# EAGLE board fdc6326l_breakout_panel (EAGLE 6.5.0)
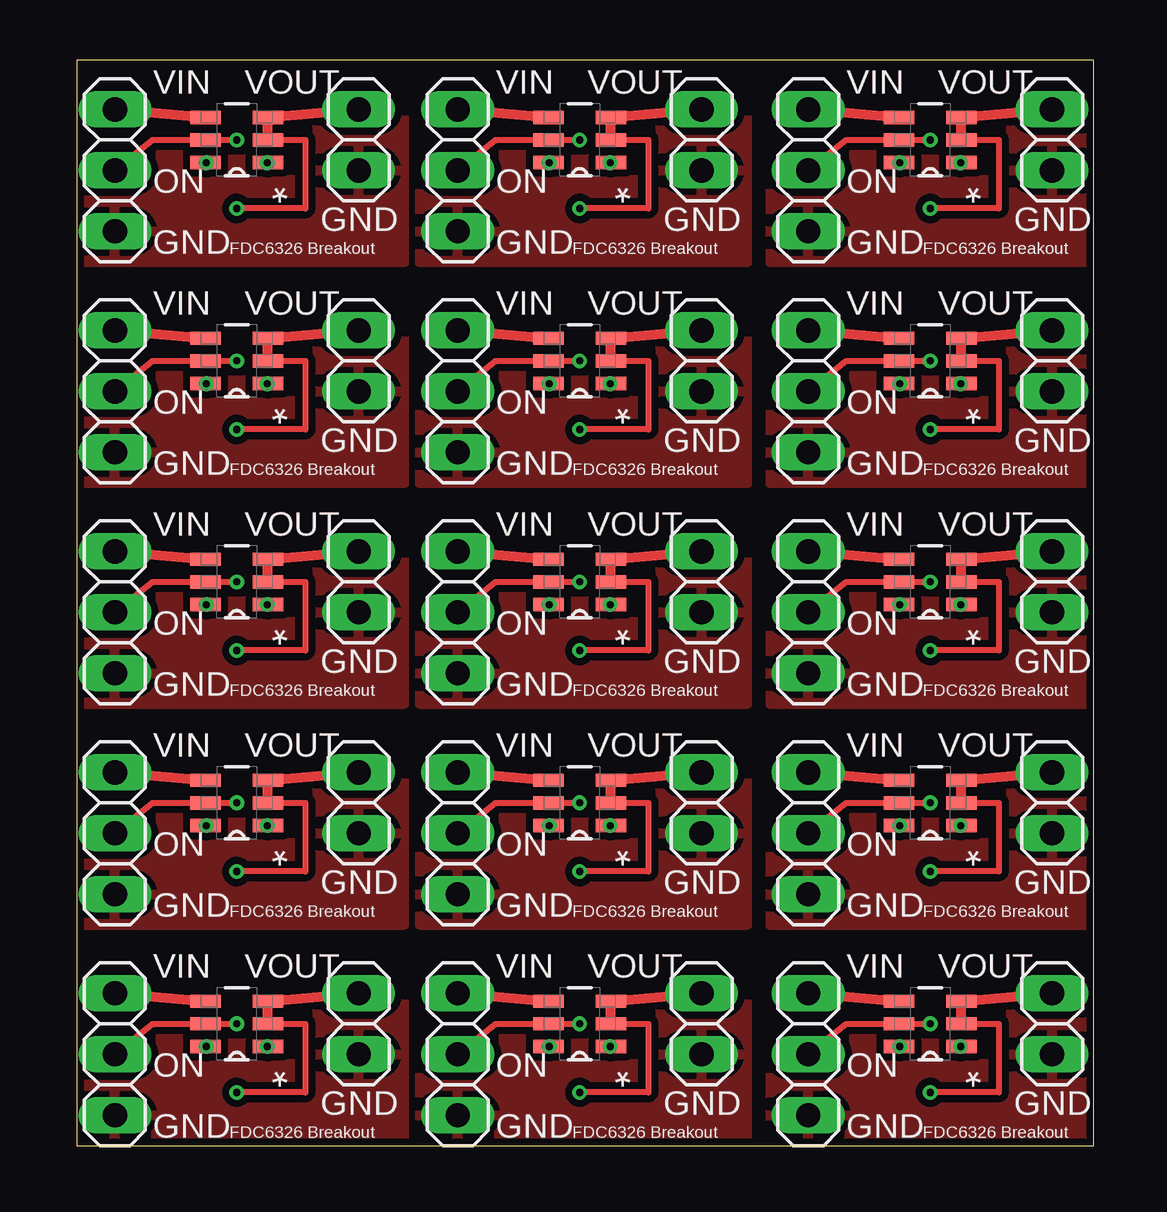
[diagram p0: board, top side]
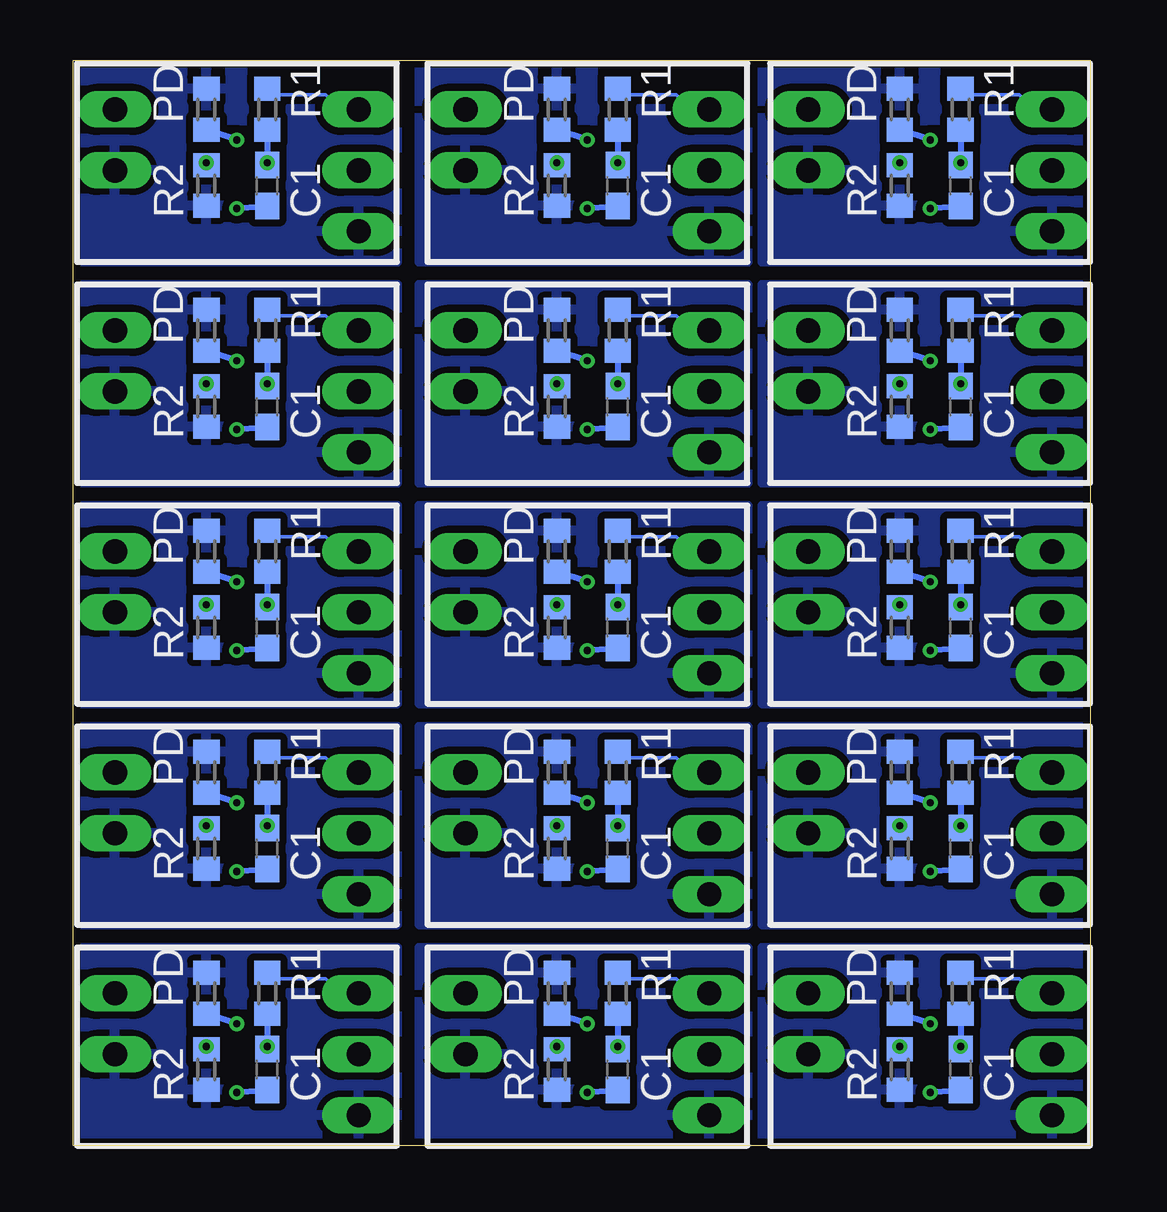
[diagram p1: board, bottom side, seen from below]

Size 42.38 x 45.24 mm. Coordinates in mm from the lower left corner, seen from the top.
Outline: 0,0 42.38,0 42.38,45.24 0,45.24 0,0
Copper layers (1*2*15*16): Top 0.035mm / dielectric 0.2mm / Route2 0.0175mm / dielectric 1.1mm / Route15 0.0175mm / dielectric 0.2mm / Bottom 0.035mm
Design rules "SeeedStudio_DRU_no_angle_20130527": minimum track width 6mil, minimum drill 12mil, track to track 6mil, track to pad 6mil, pad to pad 6mil, via to via 6mil, smd to smd 0mil, copper to edge 10mil, drill to drill 10mil, minimum pad ring 6mil, minimum via ring 6mil, stop-mask expansion 2mil, vias tented up to drill 25mil, thermal gap 10mil

## Footprints (pad centres in the part's own frame; a part is rotated, then mirrored left to right if it is on the bottom)
C0603 = smd 1.1 x 1: 1 -0.85,0; 2 0.85,0
1X03 = drill 1.016 long: 1 -2.54,0; 2 0,0; 3 2.54,0
1X02 = drill 1.016 long: 1 -1.27,0; 2 1.27,0
R0603 = smd 1 x 1.1: 1 -0.85,0; 2 0.85,0
SOT95P280X110-6N = smd 1.27 x 0.559: 1 -1.295,0.94; 2 -1.295,0; 3 -1.295,-0.94; 4 1.295,-0.94; 5 1.295,0; 6 1.295,0.94

## Placement (x,y rotation side)
C1  10pF  [C0603]  5.4,3.17 90 bottom
C2  10pF  [C0603]  5.4,12.38 90 bottom
C3  10pF  [C0603]  19.68,3.17 90 bottom
C4  10pF  [C0603]  19.68,12.38 90 bottom
C5  10pF  [C0603]  34.29,3.17 90 bottom
C6  10pF  [C0603]  34.29,12.38 90 bottom
C7  10pF  [C0603]  5.4,21.59 90 bottom
C8  10pF  [C0603]  19.68,21.59 90 bottom
C9  10pF  [C0603]  34.29,21.59 90 bottom
C10  10pF  [C0603]  5.4,30.8 90 bottom
C11  10pF  [C0603]  19.68,30.8 90 bottom
C12  10pF  [C0603]  34.29,30.8 90 bottom
C13  10pF  [C0603]  5.4,40.01 90 bottom
C14  10pF  [C0603]  19.68,40.01 90 bottom
C15  10pF  [C0603]  34.29,40.01 90 bottom
JP1  [1X03]  1.59,3.81 270 top
JP2  [1X02]  11.75,5.08 270 top
JP3  [1X03]  1.59,13.02 270 top
JP4  [1X02]  11.75,14.29 270 top
JP5  [1X03]  15.88,3.81 270 top
JP6  [1X02]  26.04,5.08 270 top
JP7  [1X03]  15.88,13.02 270 top
JP8  [1X02]  26.04,14.29 270 top
JP9  [1X03]  30.48,3.81 270 top
JP10  [1X02]  40.64,5.08 270 top
JP11  [1X03]  30.48,13.02 270 top
JP12  [1X02]  40.64,14.29 270 top
JP13  [1X03]  1.59,22.23 270 top
JP14  [1X02]  11.75,23.5 270 top
JP15  [1X03]  15.88,22.23 270 top
JP16  [1X02]  26.04,23.5 270 top
JP17  [1X03]  30.48,22.23 270 top
JP18  [1X02]  40.64,23.5 270 top
JP19  [1X03]  1.59,31.43 270 top
JP20  [1X02]  11.75,32.7 270 top
JP21  [1X03]  15.88,31.43 270 top
JP22  [1X02]  26.04,32.7 270 top
JP23  [1X03]  30.48,31.43 270 top
JP24  [1X02]  40.64,32.7 270 top
JP25  [1X03]  1.59,40.64 270 top
JP26  [1X02]  11.75,41.91 270 top
JP27  [1X03]  15.88,40.64 270 top
JP28  [1X02]  26.04,41.91 270 top
JP29  [1X03]  30.48,40.64 270 top
JP30  [1X02]  40.64,41.91 270 top
PD  10k  [R0603]  7.94,6.35 90 bottom
PD1  10k  [R0603]  7.94,15.56 90 bottom
PD2  10k  [R0603]  22.23,6.35 90 bottom
PD3  10k  [R0603]  22.23,15.56 90 bottom
PD4  10k  [R0603]  36.83,6.35 90 bottom
PD5  10k  [R0603]  36.83,15.56 90 bottom
PD6  10k  [R0603]  7.94,24.77 90 bottom
PD7  10k  [R0603]  22.23,24.77 90 bottom
PD8  10k  [R0603]  36.83,24.77 90 bottom
PD9  10k  [R0603]  7.94,33.97 90 bottom
PD10  10k  [R0603]  22.23,33.97 90 bottom
PD11  10k  [R0603]  36.83,33.97 90 bottom
PD12  10k  [R0603]  7.94,43.18 90 bottom
PD13  10k  [R0603]  22.23,43.18 90 bottom
PD14  10k  [R0603]  36.83,43.18 90 bottom
R1  100k  [R0603]  5.4,6.35 270 bottom
R2  1k  [R0603]  7.94,3.17 270 bottom
R3  100k  [R0603]  5.4,15.56 270 bottom
R4  1k  [R0603]  7.94,12.38 270 bottom
R5  100k  [R0603]  19.68,6.35 270 bottom
R6  1k  [R0603]  22.23,3.17 270 bottom
R7  100k  [R0603]  19.68,15.56 270 bottom
R8  1k  [R0603]  22.23,12.38 270 bottom
R9  100k  [R0603]  34.29,6.35 270 bottom
R10  1k  [R0603]  36.83,3.17 270 bottom
R11  100k  [R0603]  34.29,15.56 270 bottom
R12  1k  [R0603]  36.83,12.38 270 bottom
R13  100k  [R0603]  5.4,24.77 270 bottom
R14  1k  [R0603]  7.94,21.59 270 bottom
R15  100k  [R0603]  19.68,24.77 270 bottom
R16  1k  [R0603]  22.23,21.59 270 bottom
R17  100k  [R0603]  34.29,24.77 270 bottom
R18  1k  [R0603]  36.83,21.59 270 bottom
R19  100k  [R0603]  5.4,33.97 270 bottom
R20  1k  [R0603]  7.94,30.8 270 bottom
R21  100k  [R0603]  19.68,33.97 270 bottom
R22  1k  [R0603]  22.23,30.8 270 bottom
R23  100k  [R0603]  34.29,33.97 270 bottom
R24  1k  [R0603]  36.83,30.8 270 bottom
R25  100k  [R0603]  5.4,43.18 270 bottom
R26  1k  [R0603]  7.94,40.01 270 bottom
R27  100k  [R0603]  19.68,43.18 270 bottom
R28  1k  [R0603]  22.23,40.01 270 bottom
R29  100k  [R0603]  34.29,43.18 270 bottom
R30  1k  [R0603]  36.83,40.01 270 bottom
U1  FDC6326L  [SOT95P280X110-6N]  6.67,5.08 180 top
U2  FDC6326L  [SOT95P280X110-6N]  6.67,14.29 180 top
U3  FDC6326L  [SOT95P280X110-6N]  20.95,5.08 180 top
U4  FDC6326L  [SOT95P280X110-6N]  20.95,14.29 180 top
U5  FDC6326L  [SOT95P280X110-6N]  35.56,5.08 180 top
U6  FDC6326L  [SOT95P280X110-6N]  35.56,14.29 180 top
U7  FDC6326L  [SOT95P280X110-6N]  6.67,23.5 180 top
U8  FDC6326L  [SOT95P280X110-6N]  20.95,23.5 180 top
U9  FDC6326L  [SOT95P280X110-6N]  35.56,23.5 180 top
U10  FDC6326L  [SOT95P280X110-6N]  6.67,32.7 180 top
U11  FDC6326L  [SOT95P280X110-6N]  20.95,32.7 180 top
U12  FDC6326L  [SOT95P280X110-6N]  35.56,32.7 180 top
U13  FDC6326L  [SOT95P280X110-6N]  6.67,41.91 180 top
U14  FDC6326L  [SOT95P280X110-6N]  20.95,41.91 180 top
U15  FDC6326L  [SOT95P280X110-6N]  35.56,41.91 180 top

## Library data of the parts
C1-C15 PD PD1-PD14 R1-R30 = rcl
JP1-JP30 = pinhead
U1-U15 = Fairchild_By_element14_Batch_1; MPN: FDC6326L; OC_FARNELL: 1706325; OC_NEWARK: 58K1423; PACKAGE: SSOT-23-6; SUPPLIER: FAIRCHILD SEMICONDUCTOR

## Nets
C1_R1: C1.2 R1.2 U1.6
C1_R2: C2.2 R3.2 U2.6
C1_R3: C3.2 R5.2 U3.6
C1_R4: C4.2 R7.2 U4.6
C1_R5: C5.2 R9.2 U5.6
C1_R6: C6.2 R11.2 U6.6
C1_R7: C7.2 R13.2 U7.6
C1_R8: C8.2 R15.2 U8.6
C1_R9: C9.2 R17.2 U9.6
C1_R10: C10.2 R19.2 U10.6
C1_R11: C11.2 R21.2 U11.6
C1_R12: C12.2 R23.2 U12.6
C1_R13: C13.2 R25.2 U13.6
C1_R14: C14.2 R27.2 U14.6
C1_R15: C15.2 R29.2 U15.6
GND: JP1.3 JP2.2 PD.2 R2.2
GND1: JP3.3 JP4.2 PD1.2 R4.2
GND2: JP5.3 JP6.2 PD2.2 R6.2
GND3: JP7.3 JP8.2 PD3.2 R8.2
GND4: JP9.3 JP10.2 PD4.2 R10.2
GND5: JP11.3 JP12.2 PD5.2 R12.2
GND6: JP13.3 JP14.2 PD6.2 R14.2
GND7: JP15.3 JP16.2 PD7.2 R16.2
GND8: JP17.3 JP18.2 PD8.2 R18.2
GND9: JP19.3 JP20.2 PD9.2 R20.2
GND10: JP21.3 JP22.2 PD10.2 R22.2
GND11: JP23.3 JP24.2 PD11.2 R24.2
GND12: JP25.3 JP26.2 PD12.2 R26.2
GND13: JP27.3 JP28.2 PD13.2 R28.2
GND14: JP29.3 JP30.2 PD14.2 R30.2
ONOFF: JP1.2 PD.1 U1.5
ONOFF1: JP3.2 PD1.1 U2.5
ONOFF2: JP5.2 PD2.1 U3.5
ONOFF3: JP7.2 PD3.1 U4.5
ONOFF4: JP9.2 PD4.1 U5.5
ONOFF5: JP11.2 PD5.1 U6.5
ONOFF6: JP13.2 PD6.1 U7.5
ONOFF7: JP15.2 PD7.1 U8.5
ONOFF8: JP17.2 PD8.1 U9.5
ONOFF9: JP19.2 PD9.1 U10.5
ONOFF10: JP21.2 PD10.1 U11.5
ONOFF11: JP23.2 PD11.1 U12.5
ONOFF12: JP25.2 PD12.1 U13.5
ONOFF13: JP27.2 PD13.1 U14.5
ONOFF14: JP29.2 PD14.1 U15.5
R1: R4.1 U2.1
R2: R2.1 U1.1
R3: R6.1 U3.1
R4: R8.1 U4.1
R5: R10.1 U5.1
R6: R12.1 U6.1
R7: R14.1 U7.1
R8: R16.1 U8.1
R9: R18.1 U9.1
R10: R20.1 U10.1
R11: R22.1 U11.1
R12: R24.1 U12.1
R13: R26.1 U13.1
R14: R28.1 U14.1
R15: R30.1 U15.1
VCC: JP1.1 R1.1 U1.4
VCC1: JP3.1 R3.1 U2.4
VCC2: JP5.1 R5.1 U3.4
VCC3: JP7.1 R7.1 U4.4
VCC4: JP9.1 R9.1 U5.4
VCC5: JP11.1 R11.1 U6.4
VCC6: JP13.1 R13.1 U7.4
VCC7: JP15.1 R15.1 U8.4
VCC8: JP17.1 R17.1 U9.4
VCC9: JP19.1 R19.1 U10.4
VCC10: JP21.1 R21.1 U11.4
VCC11: JP23.1 R23.1 U12.4
VCC12: JP25.1 R25.1 U13.4
VCC13: JP27.1 R27.1 U14.4
VCC14: JP29.1 R29.1 U15.4
VOUT: C1.1 JP2.1 U1.2 U1.3
VOUT1: C2.1 JP4.1 U2.2 U2.3
VOUT2: C3.1 JP6.1 U3.2 U3.3
VOUT3: C4.1 JP8.1 U4.2 U4.3
VOUT4: C5.1 JP10.1 U5.2 U5.3
VOUT5: C6.1 JP12.1 U6.2 U6.3
VOUT6: C7.1 JP14.1 U7.2 U7.3
VOUT7: C8.1 JP16.1 U8.2 U8.3
VOUT8: C9.1 JP18.1 U9.2 U9.3
VOUT9: C10.1 JP20.1 U10.2 U10.3
VOUT10: C11.1 JP22.1 U11.2 U11.3
VOUT11: C12.1 JP24.1 U12.2 U12.3
VOUT12: C13.1 JP26.1 U13.2 U13.3
VOUT13: C14.1 JP28.1 U14.2 U14.3
VOUT14: C15.1 JP30.1 U15.2 U15.3

## Tracks (layer width: path | path; a pad name or v marks a point on that pad's centre or on a via)
C1_R1  (via drill 0.3)
  Top 0.152: v5.4,4.13 5.4,4.12 U1.6
  Bottom 0.254: R1.2 v5.4,4.13 C1.2
C1_R2  (via drill 0.3)
  Top 0.152: v5.4,13.34 5.4,13.32 U2.6
  Bottom 0.254: R3.2 v5.4,13.34 C2.2
C1_R3  (via drill 0.3)
  Top 0.152: v19.68,4.13 19.68,4.12 U3.6
  Bottom 0.254: R5.2 v19.68,4.13 C3.2
C1_R4  (via drill 0.3)
  Top 0.152: v19.68,13.34 19.68,13.32 U4.6
  Bottom 0.254: R7.2 v19.68,13.34 C4.2
C1_R5  (via drill 0.3)
  Top 0.152: v34.29,4.13 34.29,4.12 U5.6
  Bottom 0.254: R9.2 v34.29,4.13 C5.2
C1_R6  (via drill 0.3)
  Top 0.152: v34.29,13.34 34.29,13.32 U6.6
  Bottom 0.254: R11.2 v34.29,13.34 C6.2
C1_R7  (via drill 0.3)
  Top 0.152: v5.4,22.54 v5.4,22.53 U7.6
  Bottom 0.254: R13.2 v5.4,22.54 C7.2
C1_R8  (via drill 0.3)
  Top 0.152: v19.68,22.54 v19.68,22.53 U8.6
  Bottom 0.254: R15.2 v19.68,22.54 C8.2
C1_R9  (via drill 0.3)
  Top 0.152: v34.29,22.54 v34.29,22.53 U9.6
  Bottom 0.254: R17.2 v34.29,22.54 C9.2
C1_R10  (via drill 0.3)
  Top 0.152: v5.4,31.75 5.4,31.74 U10.6
  Bottom 0.254: R19.2 v5.4,31.75 C10.2
C1_R11  (via drill 0.3)
  Top 0.152: v19.68,31.75 19.68,31.74 U11.6
  Bottom 0.254: R21.2 v19.68,31.75 C11.2
C1_R12  (via drill 0.3)
  Top 0.152: v34.29,31.75 34.29,31.74 U12.6
  Bottom 0.254: R23.2 v34.29,31.75 C12.2
C1_R13  (via drill 0.3)
  Top 0.152: v5.4,40.96 5.4,40.95 U13.6
  Bottom 0.254: R25.2 v5.4,40.96 C13.2
C1_R14  (via drill 0.3)
  Top 0.152: v19.68,40.96 19.68,40.95 U14.6
  Bottom 0.254: R27.2 v19.68,40.96 C14.2
C1_R15  (via drill 0.3)
  Top 0.152: v34.29,40.96 34.29,40.95 U15.6
  Bottom 0.254: R29.2 v34.29,40.96 C15.2
GND
  pour Bottom (isolate 0.305): 0,8.26 0,0 13.65,0 13.65,8.26
  pour Top (isolate 0.305): 0,8.26 0,0 13.65,0 13.65,8.26
GND1
  pour Bottom (isolate 0.305): 0,17.46 0,9.21 13.65,9.21 13.65,17.46
  pour Top (isolate 0.305): 0,17.46 0,9.21 13.65,9.21 13.65,17.46
GND2
  pour Bottom (isolate 0.305): 14.29,8.26 14.29,0 27.94,0 27.94,8.26
  pour Top (isolate 0.305): 14.29,8.26 14.29,0 27.94,0 27.94,8.26
GND3
  pour Bottom (isolate 0.305): 14.29,17.46 14.29,9.21 27.94,9.21 27.94,17.46
  pour Top (isolate 0.305): 14.29,17.46 14.29,9.21 27.94,9.21 27.94,17.46
GND4
  pour Bottom (isolate 0.305): 28.89,8.26 28.89,0 42.55,0 42.55,8.26
  pour Top (isolate 0.305): 28.89,8.26 28.89,0 42.55,0 42.55,8.26
GND5
  pour Bottom (isolate 0.305): 28.89,17.46 28.89,9.21 42.55,9.21 42.55,17.46
  pour Top (isolate 0.305): 28.89,17.46 28.89,9.21 42.55,9.21 42.55,17.46
GND6
  pour Bottom (isolate 0.305): 0,26.67 0,18.41 13.65,18.41 13.65,26.67
  pour Top (isolate 0.305): 0,26.67 0,18.41 13.65,18.41 13.65,26.67
GND7
  pour Bottom (isolate 0.305): 14.29,26.67 14.29,18.41 27.94,18.41 27.94,26.67
  pour Top (isolate 0.305): 14.29,26.67 14.29,18.41 27.94,18.41 27.94,26.67
GND8
  pour Bottom (isolate 0.305): 28.89,26.67 28.89,18.41 42.55,18.41 42.55,26.67
  pour Top (isolate 0.305): 28.89,26.67 28.89,18.41 42.55,18.41 42.55,26.67
GND9
  pour Bottom (isolate 0.305): 0,35.88 0,27.62 13.65,27.62 13.65,35.88
  pour Top (isolate 0.305): 0,35.88 0,27.62 13.65,27.62 13.65,35.88
GND10
  pour Bottom (isolate 0.305): 14.29,35.88 14.29,27.62 27.94,27.62 27.94,35.88
  pour Top (isolate 0.305): 14.29,35.88 14.29,27.62 27.94,27.62 27.94,35.88
GND11
  pour Bottom (isolate 0.305): 28.89,35.88 28.89,27.62 42.55,27.62 42.55,35.88
  pour Top (isolate 0.305): 28.89,35.88 28.89,27.62 42.55,27.62 42.55,35.88
GND12
  pour Bottom (isolate 0.305): 0,45.09 0,36.83 13.65,36.83 13.65,45.09
  pour Top (isolate 0.305): 0,45.09 0,36.83 13.65,36.83 13.65,45.09
GND13
  pour Bottom (isolate 0.305): 14.29,45.09 14.29,36.83 27.94,36.83 27.94,45.09
  pour Top (isolate 0.305): 14.29,45.09 14.29,36.83 27.94,36.83 27.94,45.09
GND14
  pour Bottom (isolate 0.305): 28.89,45.09 28.89,36.83 42.55,36.83 42.55,45.09
  pour Top (isolate 0.305): 28.89,45.09 28.89,36.83 42.55,36.83 42.55,45.09
ONOFF  (via drill 0.3)
  Top 0.254: JP1.2 3.17,5.08 U1.5 v6.67,5.08
  Bottom 0.254: v6.67,5.08 PD.1
ONOFF1  (via drill 0.3)
  Top 0.254: JP3.2 3.17,14.29 U2.5 v6.67,14.29
  Bottom 0.254: v6.67,14.29 PD1.1
ONOFF2  (via drill 0.3)
  Top 0.254: JP5.2 17.46,5.08 U3.5 v20.95,5.08
  Bottom 0.254: v20.95,5.08 PD2.1
ONOFF3  (via drill 0.3)
  Top 0.254: JP7.2 17.46,14.29 U4.5 v20.95,14.29
  Bottom 0.254: v20.95,14.29 PD3.1
ONOFF4  (via drill 0.3)
  Top 0.254: JP9.2 32.07,5.08 U5.5 v35.56,5.08
  Bottom 0.254: v35.56,5.08 PD4.1
ONOFF5  (via drill 0.3)
  Top 0.254: JP11.2 32.07,14.29 U6.5 v35.56,14.29
  Bottom 0.254: v35.56,14.29 PD5.1
ONOFF6  (via drill 0.3)
  Top 0.254: JP13.2 3.17,23.5 U7.5 v6.67,23.5
  Bottom 0.254: v6.67,23.5 PD6.1
ONOFF7  (via drill 0.3)
  Top 0.254: JP15.2 17.46,23.5 U8.5 v20.95,23.5
  Bottom 0.254: v20.95,23.5 PD7.1
ONOFF8  (via drill 0.3)
  Top 0.254: JP17.2 32.07,23.5 U9.5 v35.56,23.5
  Bottom 0.254: v35.56,23.5 PD8.1
ONOFF9  (via drill 0.3)
  Top 0.254: JP19.2 3.17,32.7 U10.5 v6.67,32.7
  Bottom 0.254: v6.67,32.7 PD9.1
ONOFF10  (via drill 0.3)
  Top 0.254: JP21.2 17.46,32.7 U11.5 v20.95,32.7
  Bottom 0.254: v20.95,32.7 PD10.1
ONOFF11  (via drill 0.3)
  Top 0.254: JP23.2 32.07,32.7 U12.5 v35.56,32.7
  Bottom 0.254: v35.56,32.7 PD11.1
ONOFF12  (via drill 0.3)
  Top 0.254: JP25.2 3.17,41.91 U13.5 v6.67,41.91
  Bottom 0.254: v6.67,41.91 PD12.1
ONOFF13  (via drill 0.3)
  Top 0.254: JP27.2 17.46,41.91 U14.5 v20.95,41.91
  Bottom 0.254: v20.95,41.91 PD13.1
ONOFF14  (via drill 0.3)
  Top 0.254: JP29.2 32.07,41.91 U15.5 v35.56,41.91
  Bottom 0.254: v35.56,41.91 PD14.1
R1  (via drill 0.3)
  Top 0.152: v7.94,13.34 7.94,13.32 U2.1
  Bottom 0.152: v7.94,13.34 R4.1
R2  (via drill 0.3)
  Top 0.152: v7.94,4.13 7.94,4.12 U1.1
  Bottom 0.152: v7.94,4.13 R2.1
R3  (via drill 0.3)
  Top 0.152: v22.23,4.13 22.23,4.12 U3.1
  Bottom 0.152: v22.23,4.13 R6.1
R4  (via drill 0.3)
  Top 0.152: v22.23,13.34 22.23,13.32 U4.1
  Bottom 0.152: v22.23,13.34 R8.1
R5  (via drill 0.3)
  Top 0.152: v36.83,4.13 36.83,4.12 U5.1
  Bottom 0.152: v36.83,4.13 R10.1
R6  (via drill 0.3)
  Top 0.152: v36.83,13.34 36.83,13.32 U6.1
  Bottom 0.152: v36.83,13.34 R12.1
R7  (via drill 0.3)
  Top 0.152: v7.94,22.54 v7.94,22.53 U7.1
  Bottom 0.152: v7.94,22.54 R14.1
R8  (via drill 0.3)
  Top 0.152: v22.23,22.54 v22.23,22.53 U8.1
  Bottom 0.152: v22.23,22.54 R16.1
R9  (via drill 0.3)
  Top 0.152: v36.83,22.54 v36.83,22.53 U9.1
  Bottom 0.152: v36.83,22.54 R18.1
R10  (via drill 0.3)
  Top 0.152: v7.94,31.75 7.94,31.74 U10.1
  Bottom 0.152: v7.94,31.75 R20.1
R11  (via drill 0.3)
  Top 0.152: v22.23,31.75 22.23,31.74 U11.1
  Bottom 0.152: v22.23,31.75 R22.1
R12  (via drill 0.3)
  Top 0.152: v36.83,31.75 36.83,31.74 U12.1
  Bottom 0.152: v36.83,31.75 R24.1
R13  (via drill 0.3)
  Top 0.152: v7.94,40.96 7.94,40.95 U13.1
  Bottom 0.152: v7.94,40.96 R26.1
R14  (via drill 0.3)
  Top 0.152: v22.23,40.96 22.23,40.95 U14.1
  Bottom 0.152: v22.23,40.96 R28.1
R15  (via drill 0.3)
  Top 0.152: v36.83,40.96 36.83,40.95 U15.1
  Bottom 0.152: v36.83,40.96 R30.1
VCC
  Top 0.406: JP1.1 U1.4
  Bottom 0.152: JP1.1 2.35,6.35 2.96,6.96 5.19,6.96 5.4,7.16 R1.1
VCC1
  Top 0.406: JP3.1 U2.4
  Bottom 0.152: JP3.1 2.35,15.56 2.96,16.17 5.19,16.17 5.4,16.37 R3.1
VCC2
  Top 0.406: JP5.1 U3.4
  Bottom 0.152: JP5.1 16.64,6.35 17.25,6.96 19.48,6.96 19.68,7.16 R5.1
VCC3
  Top 0.406: JP7.1 U4.4
  Bottom 0.152: JP7.1 16.64,15.56 17.25,16.17 19.48,16.17 19.68,16.37 R7.1
VCC4
  Top 0.406: JP9.1 U5.4
  Bottom 0.152: JP9.1 31.24,6.35 31.85,6.96 34.09,6.96 34.29,7.16 R9.1
VCC5
  Top 0.406: JP11.1 U6.4
  Bottom 0.152: JP11.1 31.24,15.56 31.85,16.17 34.09,16.17 34.29,16.37 R11.1
VCC6
  Top 0.406: JP13.1 U7.4
  Bottom 0.152: JP13.1 2.35,24.77 2.96,25.38 5.19,25.38 5.4,25.58 R13.1
VCC7
  Top 0.406: JP15.1 U8.4
  Bottom 0.152: JP15.1 16.64,24.77 17.25,25.38 19.48,25.38 19.68,25.58 R15.1
VCC8
  Top 0.406: JP17.1 U9.4
  Bottom 0.152: JP17.1 31.24,24.77 31.85,25.38 34.09,25.38 34.29,25.58 R17.1
VCC9
  Top 0.406: JP19.1 U10.4
  Bottom 0.152: JP19.1 2.35,33.97 2.96,34.58 5.19,34.58 5.4,34.78 R19.1
VCC10
  Top 0.406: JP21.1 U11.4
  Bottom 0.152: JP21.1 16.64,33.97 17.25,34.58 19.48,34.58 19.68,34.78 R21.1
VCC11
  Top 0.406: JP23.1 U12.4
  Bottom 0.152: JP23.1 31.24,33.97 31.85,34.58 34.09,34.58 34.29,34.78 R23.1
VCC12
  Top 0.406: JP25.1 U13.4
  Bottom 0.152: JP25.1 2.35,43.18 2.96,43.79 5.19,43.79 5.4,43.99 R25.1
VCC13
  Top 0.406: JP27.1 U14.4
  Bottom 0.152: JP27.1 16.64,43.18 17.25,43.79 19.48,43.79 19.68,43.99 R27.1
VCC14
  Top 0.406: JP29.1 U15.4
  Bottom 0.152: JP29.1 31.24,43.18 31.85,43.79 34.09,43.79 34.29,43.99 R29.1
VOUT  (via drill 0.3)
  Top 0.254: U1.2 9.53,5.08 9.53,2.22 v6.67,2.22
  Top 0.406: U1.2 U1.3 JP2.1
  Bottom 0.254: v6.67,2.22 C1.1
VOUT1  (via drill 0.3)
  Top 0.254: U2.2 9.53,14.29 9.53,11.43 v6.67,11.43
  Top 0.406: U2.2 U2.3 JP4.1
  Bottom 0.254: v6.67,11.43 C2.1
VOUT2  (via drill 0.3)
  Top 0.254: U3.2 23.81,5.08 23.81,2.22 v20.95,2.22
  Top 0.406: U3.2 U3.3 JP6.1
  Bottom 0.254: v20.95,2.22 C3.1
VOUT3  (via drill 0.3)
  Top 0.254: U4.2 23.81,14.29 23.81,11.43 v20.95,11.43
  Top 0.406: U4.2 U4.3 JP8.1
  Bottom 0.254: v20.95,11.43 C4.1
VOUT4  (via drill 0.3)
  Top 0.254: U5.2 38.42,5.08 38.42,2.22 v35.56,2.22
  Top 0.406: U5.2 U5.3 JP10.1
  Bottom 0.254: v35.56,2.22 C5.1
VOUT5  (via drill 0.3)
  Top 0.254: U6.2 38.42,14.29 38.42,11.43 v35.56,11.43
  Top 0.406: U6.2 U6.3 JP12.1
  Bottom 0.254: v35.56,11.43 C6.1
VOUT6  (via drill 0.3)
  Top 0.254: U7.2 9.53,23.5 9.53,20.64 v6.67,20.64
  Top 0.406: U7.2 U7.3 JP14.1
  Bottom 0.254: v6.67,20.64 C7.1
VOUT7  (via drill 0.3)
  Top 0.254: U8.2 23.81,23.5 23.81,20.64 v20.95,20.64
  Top 0.406: U8.2 U8.3 JP16.1
  Bottom 0.254: v20.95,20.64 C8.1
VOUT8  (via drill 0.3)
  Top 0.254: U9.2 38.42,23.5 38.42,20.64 v35.56,20.64
  Top 0.406: U9.2 U9.3 JP18.1
  Bottom 0.254: v35.56,20.64 C9.1
VOUT9  (via drill 0.3)
  Top 0.254: U10.2 9.53,32.7 9.53,29.84 v6.67,29.84
  Top 0.406: U10.2 U10.3 JP20.1
  Bottom 0.254: v6.67,29.84 C10.1
VOUT10  (via drill 0.3)
  Top 0.254: U11.2 23.81,32.7 23.81,29.84 v20.95,29.84
  Top 0.406: U11.2 U11.3 JP22.1
  Bottom 0.254: v20.95,29.84 C11.1
VOUT11  (via drill 0.3)
  Top 0.254: U12.2 38.42,32.7 38.42,29.84 v35.56,29.84
  Top 0.406: U12.2 U12.3 JP24.1
  Bottom 0.254: v35.56,29.84 C12.1
VOUT12  (via drill 0.3)
  Top 0.254: U13.2 9.53,41.91 9.53,39.05 v6.67,39.05
  Top 0.406: U13.2 U13.3 JP26.1
  Bottom 0.254: v6.67,39.05 C13.1
VOUT13  (via drill 0.3)
  Top 0.254: U14.2 23.81,41.91 23.81,39.05 v20.95,39.05
  Top 0.406: U14.2 U14.3 JP28.1
  Bottom 0.254: v20.95,39.05 C14.1
VOUT14  (via drill 0.3)
  Top 0.254: U15.2 38.42,41.91 38.42,39.05 v35.56,39.05
  Top 0.406: U15.2 U15.3 JP30.1
  Bottom 0.254: v35.56,39.05 C15.1

## Text on the board
tNames: VIN | VOUT | VIN | VOUT | VIN | VOUT | ON | ON | ON | GND | GND | GND | GND | FDC6326 Breakout | GND | FDC6326 Breakout | GND | FDC6326 Breakout | VIN | VOUT | VIN | VOUT | VIN | VOUT | ON | ON | ON | GND | GND | GND | GND | FDC6326 Breakout | GND | FDC6326 Breakout | GND | FDC6326 Breakout | VIN | VOUT | VIN | VOUT | VIN | VOUT | ON | ON | ON | GND | GND | GND | GND | FDC6326 Breakout | GND | FDC6326 Breakout | GND | FDC6326 Breakout | VIN | VOUT | VIN | VOUT | VIN | VOUT | ON | ON | ON | GND | FDC6326 Breakout | GND | GND | FDC6326 Breakout | GND | GND | FDC6326 Breakout | GND | VIN | VOUT | VIN | VOUT | VIN | VOUT | ON | ON | ON | GND | GND | GND | GND | FDC6326 Breakout | GND | FDC6326 Breakout | GND | FDC6326 Breakout
bNames: R1 | PD | R1 | PD | R1 | PD | C1 | R2 | C1 | R2 | C1 | R2 | R1 | PD | R1 | PD | R1 | PD | C1 | R2 | C1 | R2 | C1 | R2 | R1 | PD | R1 | PD | R1 | PD | C1 | R2 | C1 | R2 | C1 | R2 | R1 | PD | R1 | PD | R1 | PD | C1 | R2 | C1 | R2 | C1 | R2 | R1 | PD | R1 | PD | R1 | PD | C1 | R2 | C1 | R2 | C1 | R2